# EAGLE board rakete (EAGLE 7.4.0)
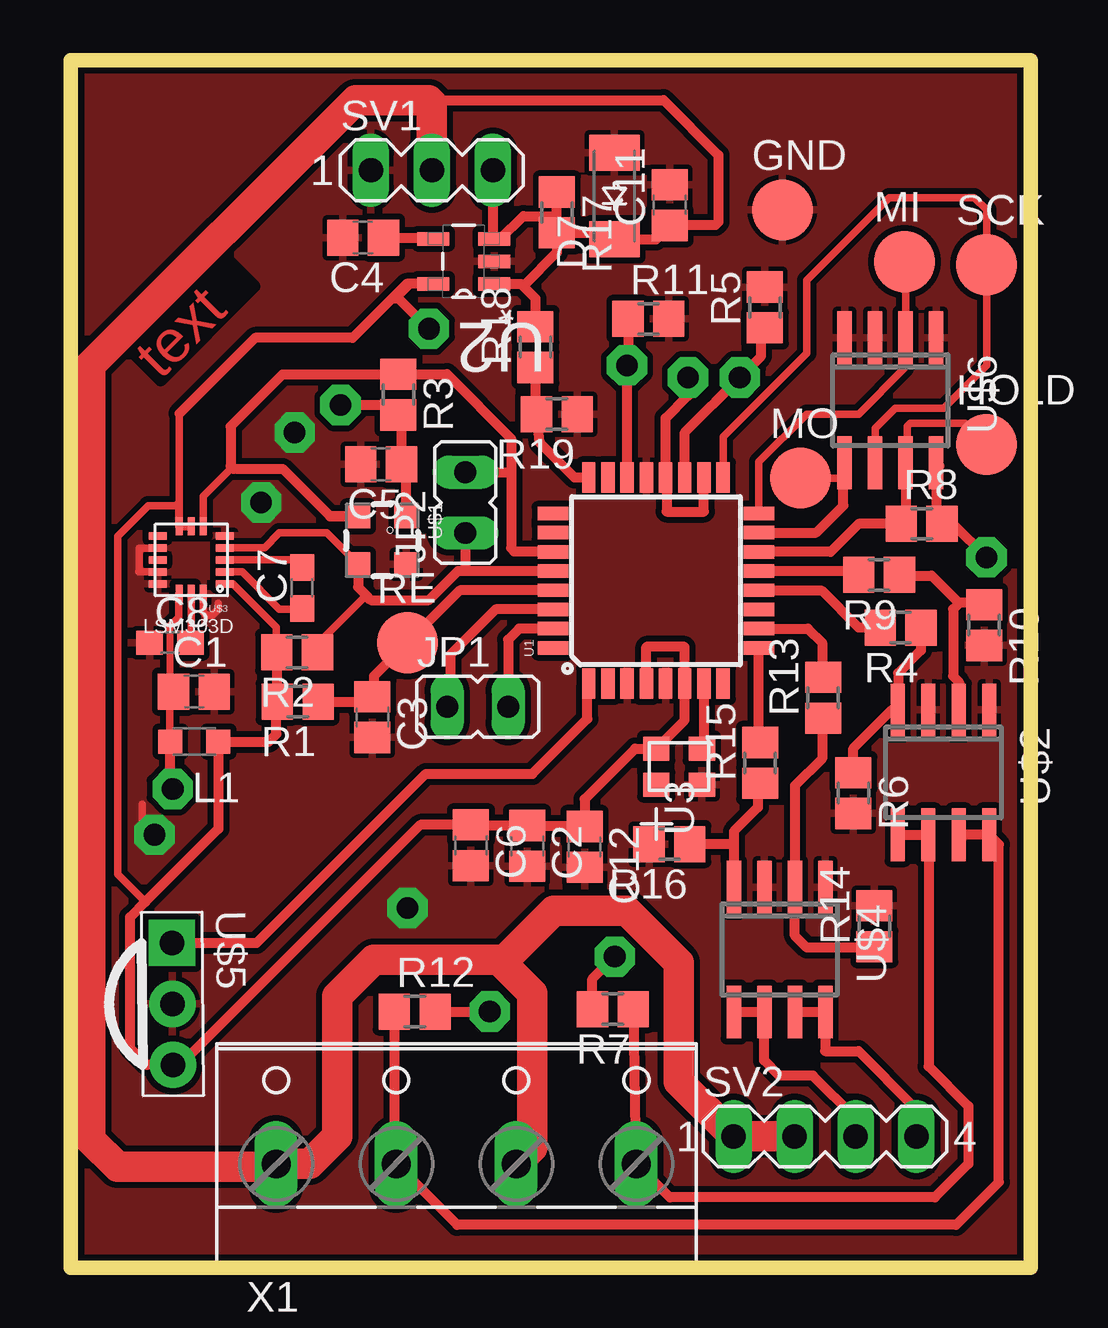
[diagram p0: board, top side]
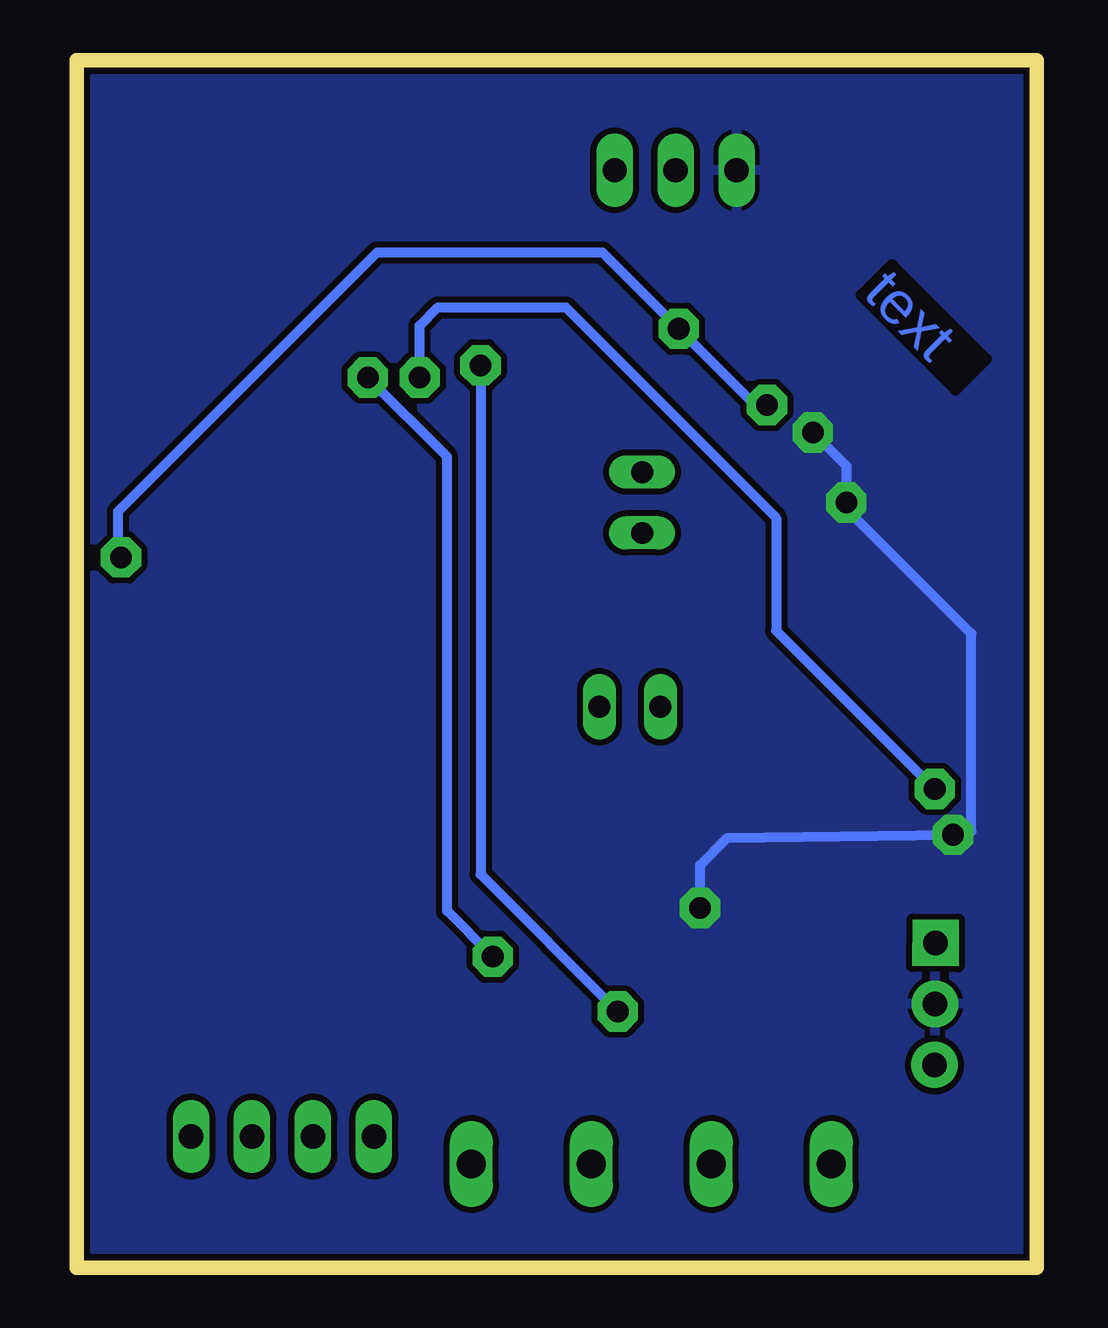
[diagram p1: board, bottom side, seen from below]

Size 40 x 50.31 mm. Coordinates in mm from the lower left corner, seen from the top.
Outline: 0,0 40,0 40,50.31 0,50.31 0,0
Copper layers (1*16): Top 0.018mm / dielectric 1.55mm / Bottom 0.018mm
Design rules "eC_2Layer_PClass6_BaseCopperO18_eCDefault": minimum track width 0.15mm, minimum drill 0.35mm, track to track 0.15mm, track to pad 0.15mm, pad to pad 0.15mm, via to via 0.15mm, smd to smd 0mil, copper to edge 0.25mm, drill to drill 0.35mm, minimum pad ring 0.175mm, minimum via ring 0.125mm, stop-mask expansion 0mil, vias tented up to drill 0.45mm, thermal gap 0.2mm

## Footprints (pad centres in the part's own frame; a part is rotated, then mirrored left to right if it is on the bottom)
C0805 = smd 1.3 x 1.5: 1 -0.85,0; 2 0.85,0
C0603 = smd 1.1 x 1: 1 -0.85,0; 2 0.85,0
SOD-123_MINI-SMA = smd 1.5 x 2.1: A 1.8,0; C -1.8,0
B2,54 = smd 2.54 x 2.54: TP 0,0
JP1 = drill 0.914 long: 1 0,-1.27; 2 0,1.27
L2012C = smd 1 x 1: 1 -1,0; 2 1,0
R0805 = smd 1.3 x 1.5: 1 -0.85,0; 2 0.85,0
MA03-1 = drill 1.016 long: 1 -2.54,0; 2 0,0; 3 2.54,0
MA04-1 = drill 1.016 long: 1 -3.81,0; 2 -1.27,0; 3 1.27,0; 4 3.81,0
TQFP32-08 = smd 1.27 x 0.559: 1 -4.293,2.8; 2 -4.293,2; 3 -4.293,1.2; 4 -4.293,0.4; 5 -4.293,-0.4; 6 -4.293,-1.2; 7 -4.293,-2; 8 -4.293,-2.8; 17 4.293,-2.8; 18 4.293,-2; 19 4.293,-1.2; 20 4.293,-0.4; 21 4.293,0.4; 22 4.293,1.2; 23 4.293,2; 24 4.293,2.8 | smd 0.559 x 1.27: 9 -2.8,-4.293; 10 -2,-4.293; 11 -1.2,-4.293; 12 -0.4,-4.293; 13 0.4,-4.293; 14 1.2,-4.293; 15 2,-4.293; 16 2.8,-4.293; 25 2.8,4.293; 26 2,4.293; 27 1.2,4.293; 28 0.4,4.293; 29 -0.4,4.293; 30 -1.2,4.293; 31 -2,4.293; 32 -2.8,4.293
SOT95P280X130-5N = smd 1.321 x 0.559: 1 -1.27,0.94; 2 -1.27,0; 3 -1.27,-0.94; 4 1.27,-0.94; 5 1.27,0.94
SI501_4_2X2.5 = smd 1 x 1.1: 1 -0.75,0.95; 2 -0.75,-0.95; 3 0.75,-0.95; 4 0.75,0.95
MS5637 = smd 1 x 1: 1 -1,1; 2 -1,-1; 3 1,-1; 4 1,1
SO8 = smd 0.6 x 2.2: 1 -1.905,-2.6; 2 -0.635,-2.6; 3 0.635,-2.6; 4 1.905,-2.6; 5 1.905,2.6; 6 0.635,2.6; 7 -0.635,2.6; 8 -1.905,2.6
TFLGA16L = smd 0.75 x 0.3: P$1 -1.4,1; P$2 -1.4,0.5; P$3 -1.4,0; P$4 -1.4,-0.5; P$5 -1.4,-1; P$9 1.4,-1; P$10 1.4,-0.5; P$11 1.4,0; P$12 1.4,0.5; P$13 1.4,1 | smd 0.3 x 0.75: P$6 -0.5,-1.4; P$7 0,-1.4; P$8 0.5,-1.4; P$14 0.5,1.4; P$15 0,1.4; P$16 -0.5,1.4
PNA460XM = drill 1.016 pad 1.93 square: 1 -2.54,0 | drill 1.016 pad 1.93: 2 0,0; 3 2.54,0
SO08 = smd 0.6 x 2.2: 1 -1.905,-2.6; 2 -0.635,-2.6; 3 0.635,-2.6; 4 1.905,-2.6; 5 1.905,2.6; 6 0.635,2.6; 7 -0.635,2.6; 8 -1.905,2.6
W237-4 = drill 1.194 long: 1 -7.5,-1.27; 2 -2.5,-1.27; 3 2.5,-1.27; 4 7.5,-1.27

## Placement (x,y rotation side)
C1  0.1  [C0805]  5.12,24 0 top
C2  0.1  [C0805]  19.01,17.57 270 top
C3  0.1  [C0805]  12.56,22.94 270 top
C4  0.1  [C0805]  12.17,42.91 180 top
C5  0.1  [C0805]  12.92,33.47 180 top
C6  0.1  [C0805]  16.67,17.59 270 top
C7  0.22uF  [C0603]  9.64,28.32 90 top
C8  4.7uF  [C0603]  4.13,26.04 0 top
C11  0.1  [C0805]  24.95,44.27 90 top
C12  0.1  [C0805]  21.4,17.52 270 top
D7  [SOD-123_MINI-SMA]  22.65,44.65 90 top
GND  TPB2,54  [B2,54]  29.64,44.07 0 top
HOLD  TPB2,54  [B2,54]  38.15,34.29 0 top
JP1  [JP1]  16.94,23.37 270 top
JP2  [JP1]  16.43,31.88 0 top
L1  [L2012C]  5.14,21.91 180 top
MI  TPB2,54  [B2,54]  34.72,41.91 0 top
MO  TPB2,54  [B2,54]  30.41,32.89 0 top
R1  10k  [R0805]  9.45,23.58 180 top
R2  3.3K  [R0805]  9.42,25.63 180 top
R3  3.3K  [R0805]  13.64,36.37 270 top
R4  [R0805]  34.56,26.66 180 top
R5  [R0805]  28.91,40 90 top
R6  [R0805]  32.61,19.77 270 top
R7  [R0805]  22.58,10.77 180 top
R8  [R0805]  35.45,30.99 0 top
R9  [R0805]  33.67,28.86 180 top
R10  [R0805]  38.05,26.77 270 top
R11  [R0805]  24.06,39.52 0 top
R12  [R0805]  14.33,10.66 0 top
R13  [R0805]  31.34,23.74 90 top
R14  [R0805]  33.47,14.22 90 top
R15  [R0805]  28.71,21.03 90 top
R16  [R0805]  24.94,17.64 180 top
R17  3.3K  [R0805]  20.25,43.96 270 top
R18  10k  [R0805]  19.36,38.35 90 top
R19  10k  [R0805]  20.25,35.56 180 top
RE  TPB2,54  [B2,54]  14.02,26.04 0 top
SCK  TPB2,54  [B2,54]  38.15,41.78 0 top
SV1  [MA03-1]  15.04,45.72 0 top
SV2  [MA04-1]  31.42,5.46 0 top
U1  ATMEGA328P_TQFP  [TQFP32-08]  24.37,28.62 90 top
U2  MIC5301-3.3YD5  [SOT95P280X130-5N]  16.36,41.92 180 top
U3  501  [SI501_4_2X2.5]  25.34,20.87 90 top
U$1  MS563702BA03  [MS5637]  12.96,30.29 270 top
U$2  FDS6984AS  [SO8]  36.36,20.63 180 top
U$3  LSM303D  [TFLGA16L]  5.01,29.48 180 top
U$4  FDS6984AS  [SO8]  29.53,13.25 180 top
U$5  PNA460XM  [PNA460XM]  4.23,10.99 270.5 top
U$6  25FL208K0RMFI041  [SO08]  34.14,36.14 180 top
X1  [W237-4]  16.05,5.59 0 top

## Library data of the parts
C1-C6 C11 C12 L1 R1-R19 = resistor
C7 C8 = rcl
D7 = diode; FARNELL: 1467545; LINK: http://lv.farnell.com/stmicroelectronics/stps0520z/diode-schottky-2a-20v-smd/dp/1467545; MFGNAME: STPS0520Z
GND HOLD MI MO RE SCK = testpad
JP1 JP2 = jumper
SV1 SV2 = con-lstb; OC_FARNELL: unknown; OC_NEWARK: unknown
U1 = SparkFun-DigitalIC; PROD_ID: IC-09069
U2 = Micrel_By_element14_Batch_1; MPN: MIC5301-3.3YD5; OC_FARNELL: 2431779; PACKAGE: SOT-23-5; SUPPLIER: MICREL SEMICONDUCTOR; URL: http://lv.farnell.com/micrel-semiconductor/mic5301-3-3yd5-tr/ldo-volt-reg-0-15a-3-3v-tsot-23/dp/2431779
U3 = SiLabs2025; MANUFACTURER_PART_NUMBER: 501; VENDOR: SILICONLABS
U$1 = freetronics-original
U$2 U$4 = FDS6984AS; FARNELL: 2454158; MFG: FDS6984AS; URL: http://lv.farnell.com/fairchild-semiconductor/fds6984as/mosfet-dual-n-ch-30v-8-5a-soic/dp/2454158
U$3 = LSM303D
U$5 = adafruit
U$6 = MEMORY-8PIN
X1 = con-wago-500; OC_FARNELL: unknown; OC_NEWARK: unknown

## Nets
+3V3: C2.1 C5.1 C6.1 C12.1 L1.1 R1.2 R2.2 R3.2 R8.2 U1.4 U1.6 U2.5 U3.4 U$1.1 U$3.P$1 U$3.P$7 U$3.P$8 U$5.3 U$6.8
A0: U1.23
A1: R18.1 R19.2 U1.24
A2: U1.25
A3: U1.26
A6: R5.1 R7.2 U1.19
A7: R11.1 R12.2 U1.22
AVCC: C1.1 L1.2 U1.18 U1.20 U$3.P$14
D0/RX: JP1.1 U1.30
D1/TX: JP1.2 U1.31
D2: U1.32
D3: U1.1 U$5.1
D4: U1.2
D5: R15.2 U1.9
D6: R13.2 U1.10
D7: U1.11
D8: R4.2 U1.12
D9: R9.2 U1.13
D10~: HOLD.TP R8.1 U1.14 U$6.7
D11/MOSI: MO.TP U1.15 U$6.5
D12/MISO: MI.TP U1.16 U$6.2
D13/SCK: SCK.TP U1.17 U$6.6
GND: C1.2 C2.2 C3.2 C4.2 C5.2 C6.2 C8.1 C11.2 C12.2 D7.A GND.TP R5.2 R6.2 R10.2 R11.2 R14.2 R16.2 R19.1 SV1.1 U1.3 U1.5 U1.21 U2.2 U3.2 U$1.4 U$2.1 U$2.3 U$3.P$5 U$3.P$10 U$3.P$12 U$3.P$13 U$3.P$16 U$4.1 U$4.3 U$5.2 U$6.1 U$6.3 U$6.4
GYROINT1: U$3.P$11
GYROINT2: U$3.P$9
N$10: U1.7 U3.3
N$13: R4.1 R6.1 U$2.4
N$18: R7.1 U$2.5 U$2.6 X1.4
N$21: C7.1 U$3.P$2
N$25: C7.2 U$3.P$3
N$27: C8.2 U$3.P$15
N$29: R9.1 R10.1 U$2.2
N$30: R12.1 U$2.7 U$2.8 X1.2
N$31: C4.1 U2.4
N$33: R13.1 R14.1 U$4.2
N$41: R15.1 R16.1 U$4.4
ON: R17.1 SV1.3 U2.3
P3: SV2.4 U$4.7 U$4.8
P4: SV2.3 U$4.5 U$4.6
RES: C3.1 R1.1 RE.TP U1.29
SCL: JP2.1 R2.1 U1.28 U$1.3 U$3.P$4
SDA: JP2.2 R3.1 U1.27 U$1.2 U$3.P$6
V+: C11.1 D7.C R17.2 R18.2 SV1.2 SV2.1 SV2.2 U2.1 X1.1 X1.3

## Tracks (layer width: path | path; a pad name or v marks a point on that pad's centre or on a via)
+3V3  (via drill 0.9 pad 1.68)
  Top 0.305: 4.51,35.58 U$3.P$8 U$3.P$7 4.99,30.86 4.5,30.86 4.5,31.88 4.37,31.75 3.23,31.75 1.96,30.48 1.96,16.38 3.1,15.24 | U$3.P$1 6.75,28.48 8.56,26.67 8.56,25.64 R2.2
  Top 0.406: 14.06,33.18 C5.1 | U$1.1 13.96,33.28 C5.1 | 4.51,35.58 7.67,38.73 11.74,38.73 13.99,40.98 U2.5 14.11,40.98 13.51,40.39 13.64,40.39 v14.91,39.12 | 36.19,33.4 U$6.8 36.05,31.24 R8.2 36.75,30.99 v38.15,29.59 | U1.4 23.97,25.86 25.57,25.86 U1.6 25.57,22.81 U3.4 23.5,21.62 21.4,19.52 C12.1 21.36,18.42 C2.1 16.7,18.42 C6.1 14.56,18.45 4.75,8.64 4.44,8.64 U$5.3 3.16,8.45 2.46,9.14 2.46,14.61 3.1,15.24 6.14,18.28 L1.1 8.25,21.91 8.56,22.23 8.56,23.54 R1.2 8.6,25.61 R2.2 | C5.1 13.77,35.52 R3.2 13.64,35.94 v11.23,35.94
  Bottom 0.406: 14.66,38.86 v14.91,39.12 | v11.23,35.94 11.74,35.94 v14.91,39.12 | v14.91,39.12 18.09,42.29 27.48,42.29 38.28,31.5 38.28,29.72 v38.15,29.59
A1
  Top 0.406: U1.24 20.99,32.91 19.52,34.38 R19.2 19.36,35.6 R18.1
A6  (via drill 0.9 pad 1.68)
  Top 0.406: R7.2 21.73,12.02 v22.66,12.95 | U1.19 25.58,34.8 v27.87,37.08 | 26.85,36.07 v27.87,37.08 | v27.87,37.08 28.75,37.97 28.75,39 R5.1
  Bottom 0.406: v22.66,12.95 24.56,14.86 24.56,33.78 v27.87,37.08
A7  (via drill 0.9 pad 1.68)
  Top 0.406: R12.2 v17.45,10.67 | U1.22 23.17,32.92 v23.17,37.59 23.21,37.64 R11.1
  Bottom 0.406: v17.45,10.67 23.17,16.38 v23.17,37.59
AVCC  (via drill 0.9 pad 1.68)
  Top 0.3: 4.5,27.18 4.5,27.11 4.12,26.73 4.12,24.15
  Top 0.305: U$3.P$14 4.5,28.07 4.5,27.18 | L1.2 4.12,21.94 4.12,24.15 C1.1
  Top 0.406: U1.18 26.37,31.5 24.82,31.5 24.82,32.91 U1.20 24.77,35.39 25.71,36.32 v25.71,37.08 | v4.24,19.94 4.14,20.04 L1.2
  Bottom 0.406: v25.71,37.08 25.71,39.24 24.94,40.01 19.61,40.01 10.85,31.24 10.85,26.54 v4.24,19.94
D0/RX
  Top 0.406: U1.30 17.69,27.42 15.8,25.53 15.8,23.5 JP1.1
D1/TX
  Top 0.406: U1.31 18.67,26.62 18.21,26.16 JP1.2
D3
  Top 0.406: U$5.1 7.74,13.53 14.78,20.57 19.23,20.57 21.52,22.86 21.52,24.27 U1.1
D5
  Top 0.406: R15.2 28.67,21.93 U1.9
D6
  Top 0.406: U1.10 30.71,26.62 31.29,26.04 31.29,24.64 R13.2
D8
  Top 0.406: R4.2 32.82,26.66 31.29,28.19 28.69,28.19 U1.12
D9
  Top 0.406: R9.2 32.66,29.02 U1.13
D10~
  Top 0.305: U$6.7 34.85,33.54 34.85,35.05 34.98,35.18 37.26,35.18 HOLD.TP 38.15,35.18
  Top 0.406: U$6.7 34.78,31.17 R8.1 32.82,30.99 31.65,29.82 U1.14
D11/MOSI
  Top 0.305: MO.TP 32.18,32.89
  Top 0.406: 32.23,33.53 U$6.5 32.18,33.48 32.18,32.89 32.18,31.75 31.05,30.62 U1.15
D12/MISO
  Top 0.305: U1.16 28.67,33.57 30.66,35.56 32.82,35.56 34.72,37.46 34.72,38.68 U$6.2 34.78,41.84 MI.TP
D13/SCK
  Top 0.305: U$6.6 33.51,34.98 34.34,35.81 36.37,35.81 38.15,37.59 SCK.TP 38.15,44.07 37.64,44.58 34.09,44.58 30.66,41.15 30.66,38.1 27.17,34.62 U1.17
GND  (via drill 0.9 pad 1.68)
  Top 0.305: U$3.P$12 2.85,28.98 | U$3.P$10 3.6,29.97 2.85,29.97 2.85,28.98 | 6.15,27.69 6.15,27.43 5.89,27.18 5.64,27.18 5.51,27.3 U$3.P$16 | v3.48,18.03 2.97,18.54 2.97,19.3 | 2.82,28.98 2.85,28.98
  Bottom 0.406: 9.45,34.8 v9.32,34.8 7.93,33.4 v7.93,31.88 7.93,31.62 2.72,26.42 2.72,18.16 v3.48,18.03 12.88,17.91 14.02,16.76 v14.02,14.99
  pour Top (isolate 0.254): -0.2,51.82 39.55,51.44 39.93,0.38 -0.08,-0.13
  pour Bottom (isolate 0.254): 40.06,0.25 0.05,0.25 -0.08,51.05 39.93,51.05
N$10
  Top 0.406: U1.7 26.37,21.91 U3.3
N$13
  Top 0.406: R4.1 35.41,25.71 34.47,24.77 34.47,23.25 U$2.4 34.21,23.23 32.61,21.63 R6.1
N$18
  Top 0.406: U$2.5 U$2.6 | R7.1 23.54,4.33 X1.4 24.95,2.92 35.99,2.92 37.39,4.32 37.39,6.73 35.74,8.38 35.74,18.03 U$2.5 | U$2.5 35.61,18.03
N$21
  Top 0.305: U$3.P$2 7.14,28.98 8.69,27.43 9.6,27.43 C7.1
N$25
  Top 0.305: U$3.P$3 9.32,29.48 C7.2
N$27
  Top 0.305: C8.2 5.01,26.08 U$3.P$15
N$29
  Top 0.406: R9.1 34.55,28.83 35.87,28.83 36.99,27.7 | R10.1 38.34,27.7 36.99,27.7 | 36.99,27.7 36.99,27.67 36.75,27.43 36.75,24.64 37.01,24.38 37.01,23.25 U$2.2
N$30
  Top 0.406: 37.14,17.89 U$2.7 U$2.8 38.66,17.63 38.66,3.56 36.88,1.78 16.09,1.78 X1.2 13.47,4.4 R12.1
N$31
  Top 0.406: C4.1 15.04,42.91 U2.4
N$33
  Top 0.406: R13.1 31.29,22.84 31.29,21.21 30.16,20.08 U$4.2 30.16,13.83 30.66,13.33 33.44,13.33 R14.1
N$41
  Top 0.406: 27.62,17.65 27.62,18.17 28.63,19.18 28.63,20.09 R15.1 | 27.62,17.65 U$4.4 | R16.1 25.8,17.65 27.62,17.65
ON
  Top 0.406: SV1.3 17.58,42.92 U2.3 17.9,42.87 18.85,43.81 20.23,43.81 R17.1
P3
  Top 0.406: U$4.7 U$4.8 31.43,9.03 31.42,9.02 32.82,9.02 35.1,6.73 35.1,5.59 SV2.4 35.23,5.71
P4
  Top 0.406: U$4.5 U$4.6 28.88,10.64 28.88,8.64 29.52,8 30.91,8 32.69,6.22 SV2.3
RES
  Top 0.406: R1.1 12.36,23.58 C3.1 | C3.1 12.62,23.85 12.62,24.64 RE.TP 16.21,28.22 U1.29 | 12.65,23.88 C3.1
SCL
  Top 0.305: U$3.P$4 8.07,29.98 8.69,30.61 10.65,30.61 U$1.3 | R2.1 9.98,25.67 12.31,28
  Top 0.406: U$1.3 11.96,28.35 12.31,28 12.5,27.81 14.91,27.81 16.12,29.02 16.43,29.02 | U1.28 16.43,29.02 | JP2.1 16.43,29.02
SDA
  Top 0.305: U$3.P$6 5.51,32.13 6.66,33.27 6.78,33.27 6.91,33.27 | 8.82,33.27 10.85,31.24 11.91,31.24 U$1.2
  Top 0.406: U1.27 20.06,29.84 18.47,29.84 18.34,29.97 18.34,33.15 | U$1.2 10.79,31.29 8.82,33.27 6.91,33.27 | 18.34,33.15 18.34,34.54 15.67,37.21 15.67,37.22 R3.1 8.82,37.21 6.66,35.05 6.66,33.4 6.78,33.27 | JP2.2 18.34,33.15
V+
  Top 0.406: X1.1 9.07,4.32 8.94,4.19 | 17.83,12.83 17.96,12.7 | U2.1 18.76,40.98 18.85,40.89 | 18.85,40.89 19.36,40.39 R18.2 | 18.85,40.89 20.25,42.3 R17.2 22.38,43.11 D7.C 24.37,42.84 C11.1 24.96,43.43 26.85,43.43 26.98,43.56 26.98,46.35 24.69,48.64 14.91,48.64 15.04,48.51
  Top 1.27: 9.07,4.32 9.96,4.32 11.1,5.46 11.1,11.3 12.62,12.83 17.83,12.83 | X1.3 19.23,4.99 19.23,11.43 17.96,12.7 20.12,14.86 23.17,14.86 25.32,12.7 25.32,7.75 SV2.1 SV2.2 | 8.94,4.19 1.96,4.19 0.81,5.33 0.81,37.59 11.86,48.64 14.91,48.64 | SV1.2 15.04,48.51

## Text on the board
Top: text
Bottom: text